# Altium PCB Pneumatics Board.PcbDoc
Units mil, origin at the board's own origin, x right, y up, seen from the top; angles counter-clockwise.
Board outline 1800 x 1500 mil, 2 copper layers (Top Layer, Bottom Layer); 8 components, 8 nets, 48 pads, 0 vias.
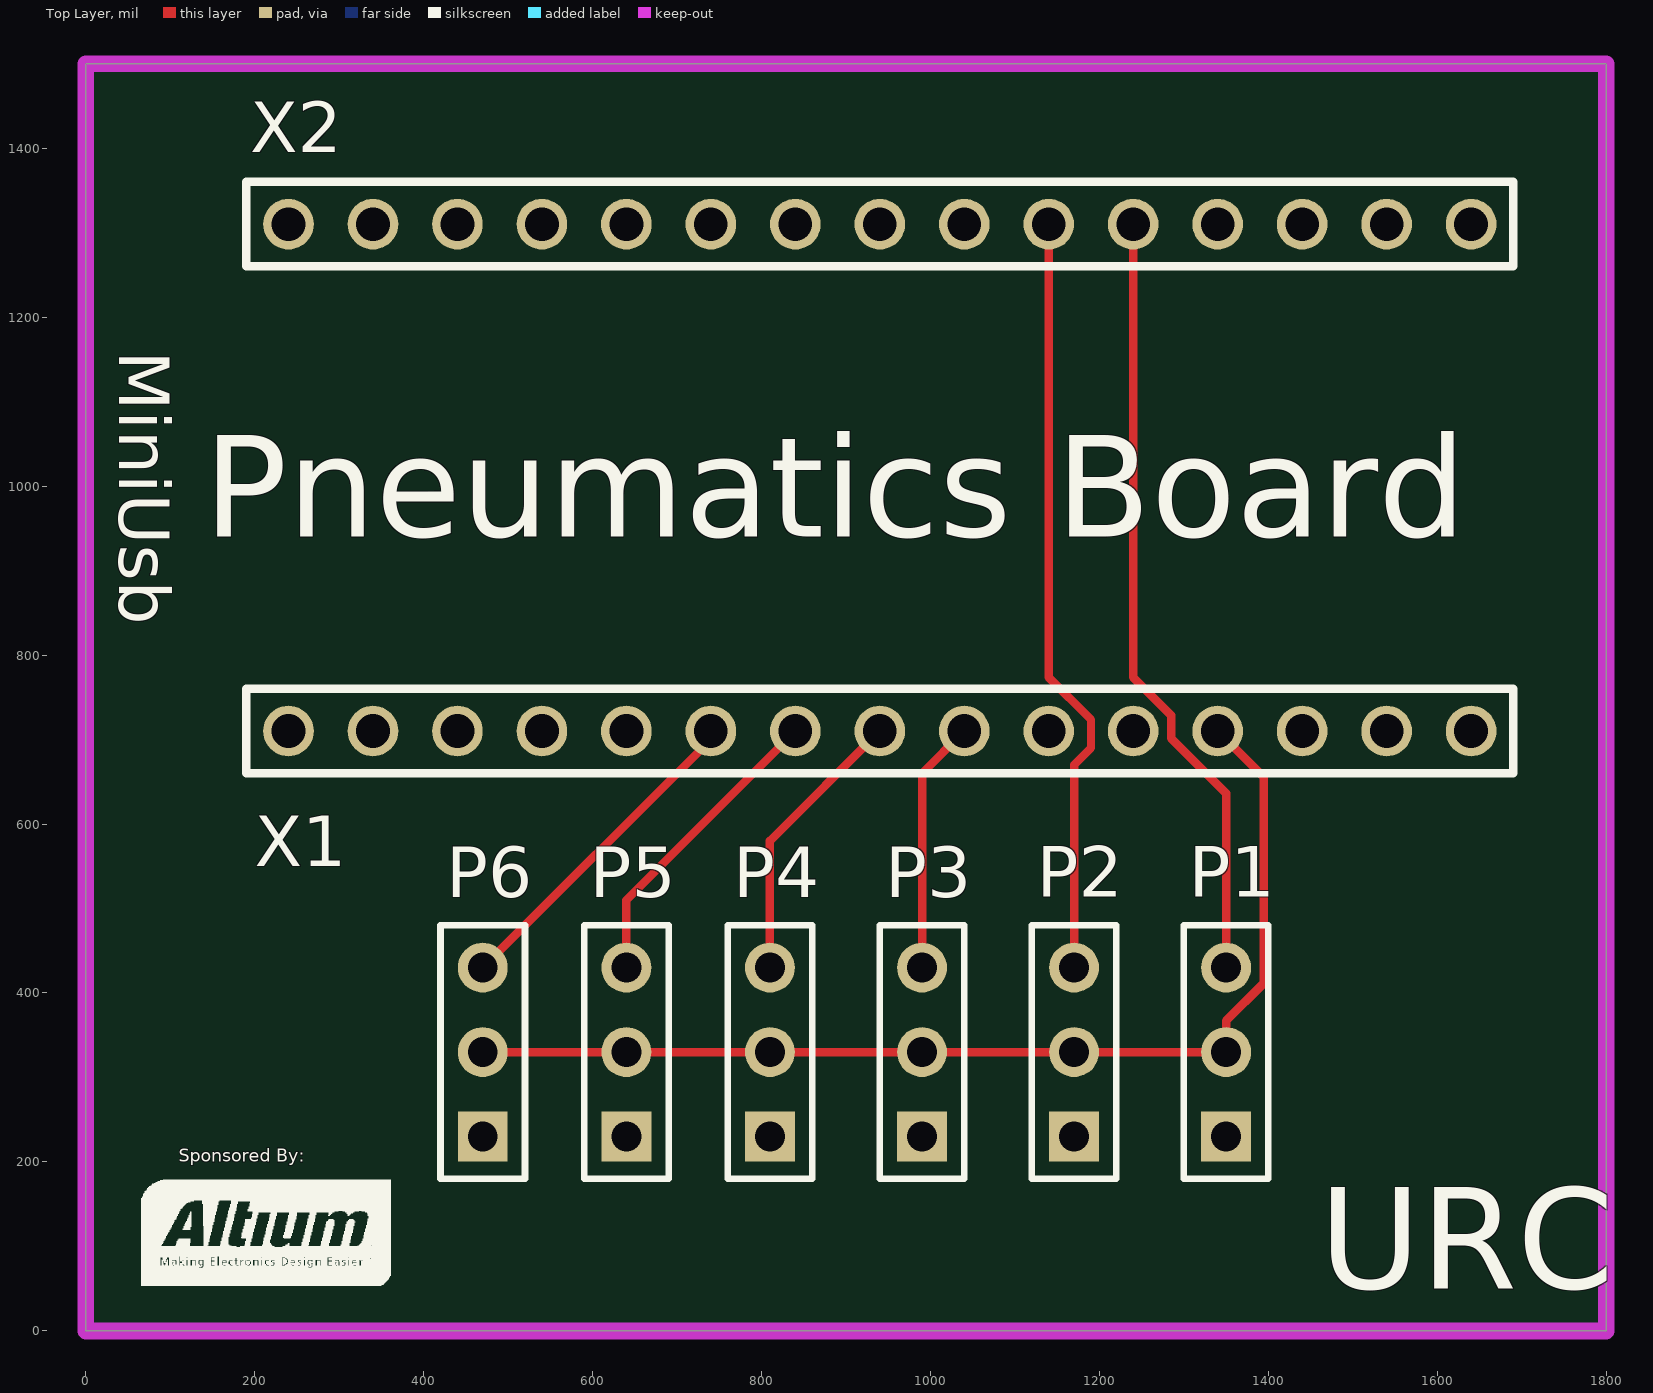
[diagram p0: Top Layer view]
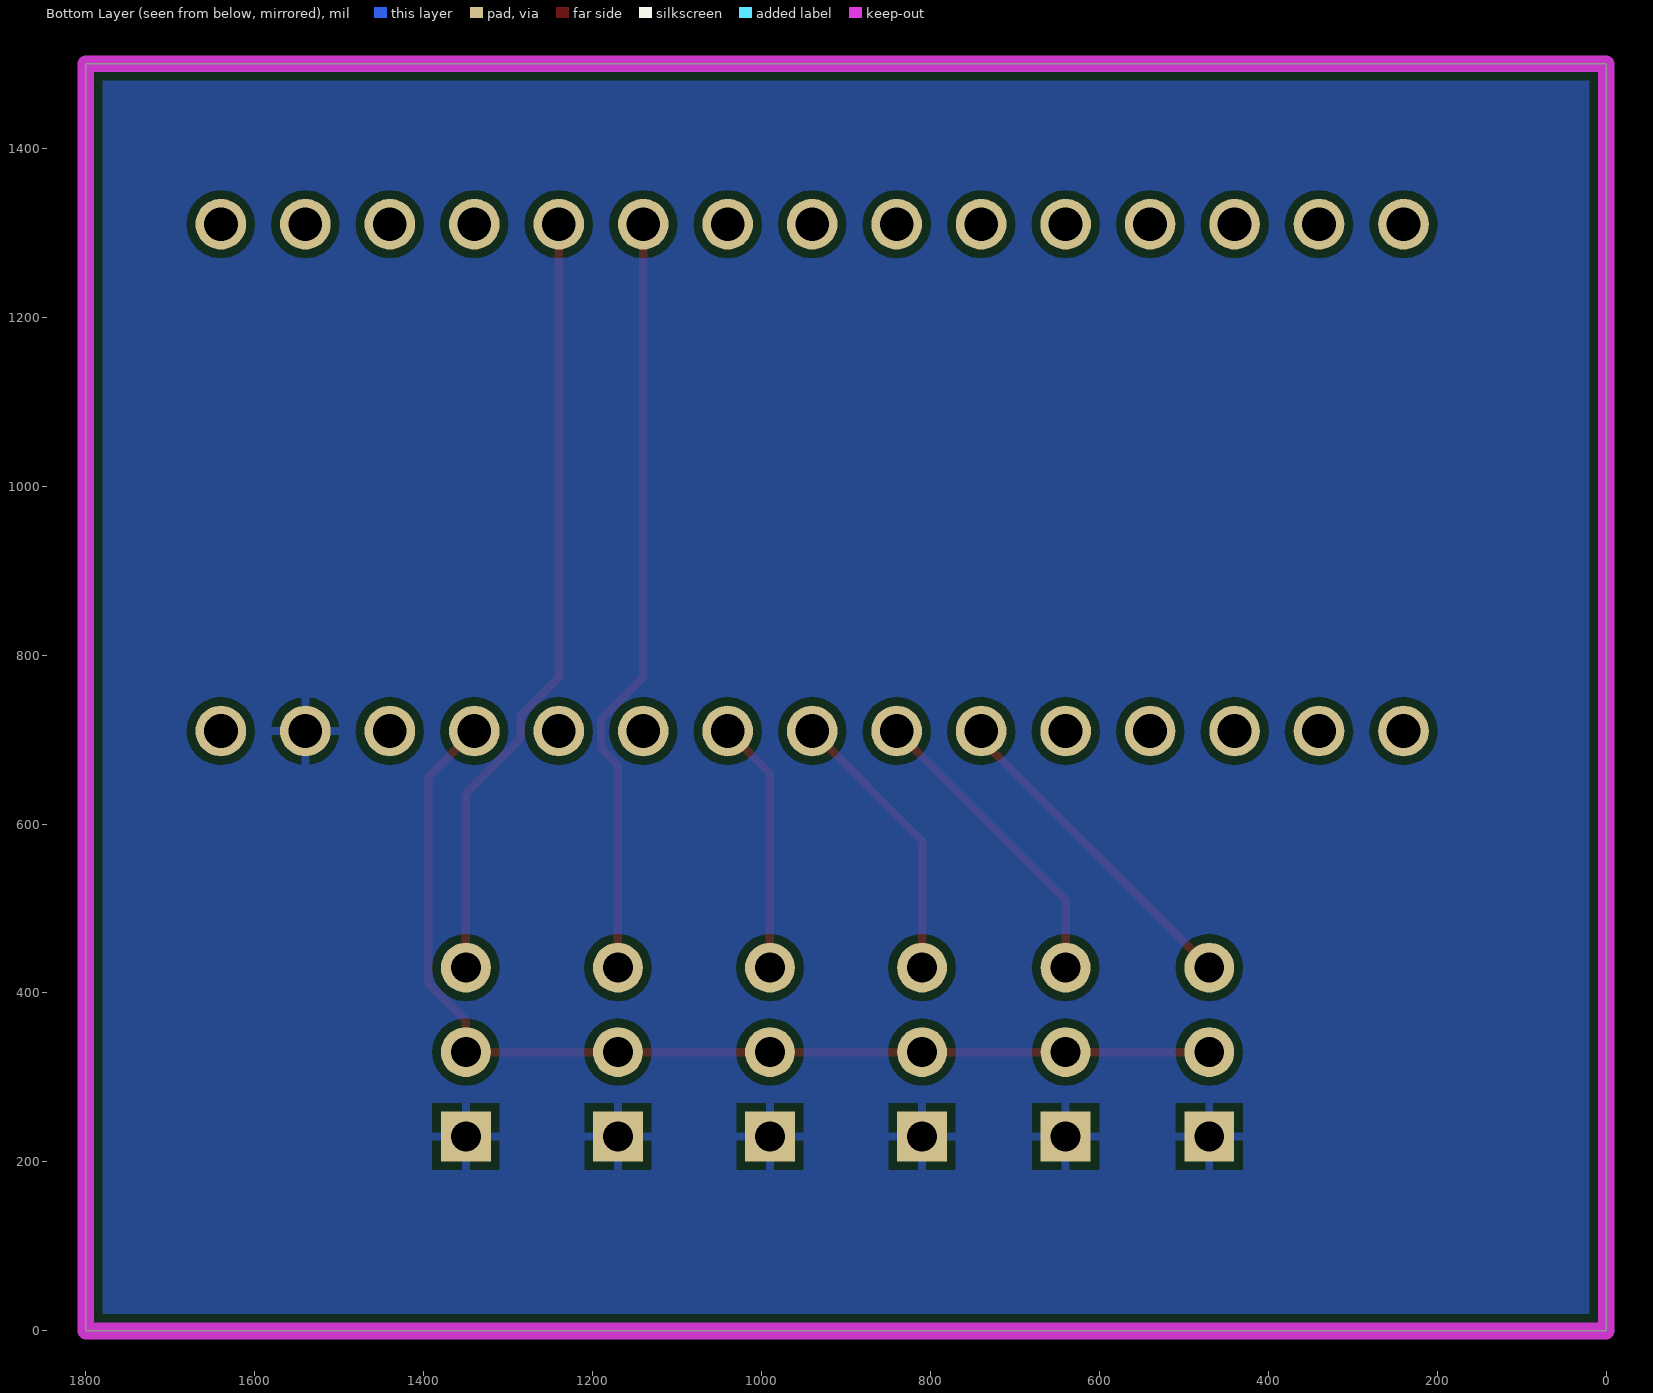
[diagram p1: Bottom Layer view, seen from below]

## Layer stack, top to bottom
Top Solder: solder mask 0.4, Solder Resist, Dk 3.5
Top Layer: signal copper 1.4
Dielectric 1: dielectric 12.6, FR-4, Dk 4.8
Bottom Layer: signal copper 1.4
Bottom Solder: solder mask 0.4, Solder Resist, Dk 3.5

## Board outline
0,0 1800,0 1800,1500 0,1500

## Design rules (kind name [scope] priority, off if disabled: settings)
Clearance [All] p1: gap=10 ignorepadtopadclearanceinfootprint=FALSE except(0: Arc-Hole Track-Hole SMDPad-Hole THPad-Hole Via-Hole Fill-Hole Poly-Hole Region-Hole Text-Hole)
PolygonConnect [All] p1: connectstyle=Relief reliefconductorwidth=10 reliefentries=4 polygonreliefangle="90 Angle" airgapwidth=10
RoomDefinition "Pneumatics Board" [InComponentClass('Pneumatics Board')] p1: confinementstyle=ConfineIn formatcopy=TRUE lockcomponents=FALSE outline 362.4,150 1440,150 1440,590 362.4,590
RoutingVias [All] p1: holewidth=28 width=50 viastyle="Through Hole" minholewidth=28 minwidth=50 maxholewidth=28 maxwidth=50
SolderMaskExpansion [All] p1: expansion=4
Width [All] p1: maxlimit=10 minlimit=10 preferedwidth=10
30 further rules are at their usual default settings.

## Components (designator, comment, footprint, x,y, rotation, side; value= is the part's Value field where it differs from the comment)
P1 "Header 3 - Female - Molex" "HDR1X3 - Female - Molex" 1350,230 r90 top
P2 "Header 3 - Female - Molex" "HDR1X3 - Female - Molex" 1170,230 r90 top
P3 "Header 3 - Female - Molex" "HDR1X3 - Female - Molex" 990,230 r90 top
P4 "Header 3 - Female - Molex" "HDR1X3 - Female - Molex" 810,230 r90 top
P5 "Header 3 - Female - Molex" "HDR1X3 - Female - Molex" 640,230 r90 top
P6 "Header 3 - Female - Molex" "HDR1X3 - Female - Molex" 470,230 r90 top
X1 "Header" "1x15 Header" 340,710 r0 top
X2 "Header" "1x15 Header" 1540,1310 r180 top

## Footprints (in the part's own frame and the unit in brackets; to place one, negate y for a bottom-side part, rotate by r counter-clockwise, add the part's x,y. Pads: shape width x height; smd on the part's side, far side on the other; paste and mask are expansions set on the pad)
"1x15 Header" [mil]
  round 60 hole 40: 1(-100,0) 2(0,0) 3(100,0) 4(200,0) 5(300,0) 6(400,0) 7(500,0) 8(600,0) 9(700,0) 10(800,0) 11(900,0) 12(1000,0) 13(1100,0) 14(1200,0) 15(1300,0)
  silkscreen extent -150,-50 1350,50, body extent -150,-50 1350,50, height 337
"HDR1X3 - Female - Molex" [mm] "Connector; Header; 3 Position"
  rect 1.5x1.5 hole 0.9: 1(0,0)
  round 1.5 hole 0.9: 2(2.54,0) 3(5.08,0)
  silkscreen extent -1.27,-1.27 6.35,1.27, body extent -1.27,-1.27 6.35,1.27, height 8.55

## Part data
P1 P2 P3 P4 P5 P6: "Header, 3-Pin"
X1 X2: library part 1x15, "1x3 Header"

## Nets (pads, with @x,y where several pads share a name; then routed paths per layer and width w, separated by ;. In a path a pad name is that pad's centre, name@x,y a point inside that pad or via, vN(x,y) a via of type N, cw(c..) or ccw(c..) an arc to the next point about the centre after c; other vN are vias at no path point)
5V: P1.2 P2.2 P3.2 P4.2 P5.2 P6.2 X1.12 | length 1296
  Top Layer w10: P6.2 P2.2 P1.2@1345,330 ; X1.12 1394.53,655.47 1394.53,411.56 1350,367.03 P1.2
GND: P1.1 P2.1 P3.1 P4.1 P5.1 P6.1 X1.14
NetP1_3: P1.3 X2.5 | length 925.6
  Top Layer w10: X2.5 1240,773.64 1285,728.64 1285,701.36 1350,636.36 P1.3
NetP2_3: P2.3 X2.6 | length 909
  Top Layer w10: X2.6 1140,773.64 1190,723.64 1190,690 1170,670 P2.3
NetP3_3: P3.3 X1.9 | length 300.7
  Top Layer w10: P3.3 990,660 X1.9
NetP4_3: P4.3 X1.8 | length 333.8
  Top Layer w10: P4.3 810,580 X1.8
NetP5_3: P5.3 X1.7 | length 362.8
  Top Layer w10: P5.3 640,510 X1.7
NetP6_3: P6.3 X1.6 | length 381.8
  Top Layer w10: P6.3 X1.6@740,700
pads on no net: X1.1 X1.2 X1.3 X1.4 X1.5 X1.10 X1.11 X1.13 X1.15 X2.1 X2.2 X2.3 X2.4 X2.7 X2.8 X2.9 X2.10 X2.11 X2.12 X2.13 X2.14 X2.15

## Polygon pours and split planes (outlines as drawn)
GND on Bottom Layer "Bottom Layer" (solid, pour order 2): 0,1500 900,1500 1800,1500 1800,1170 1800,580 1800,0 0,0 0,800

## Keep-outs
Keep-Out Layer:
  the board outline again, w20

## Silkscreen, mask and mechanical layers (free items; w line width, h text height)
Top Overlay:
  drawing of 878 lines, arcs and shapes, not listed
  text "MiniUsb" at 40,1160 h60 r270
  text "Pneumatics Board" at 140,940 h120
  text "Sponsored By:" at 110,200 h15
  text "URC" at 1460,50 h120